# EAGLE board Vectr_Combined (EAGLE 6.3), part 1 of 2
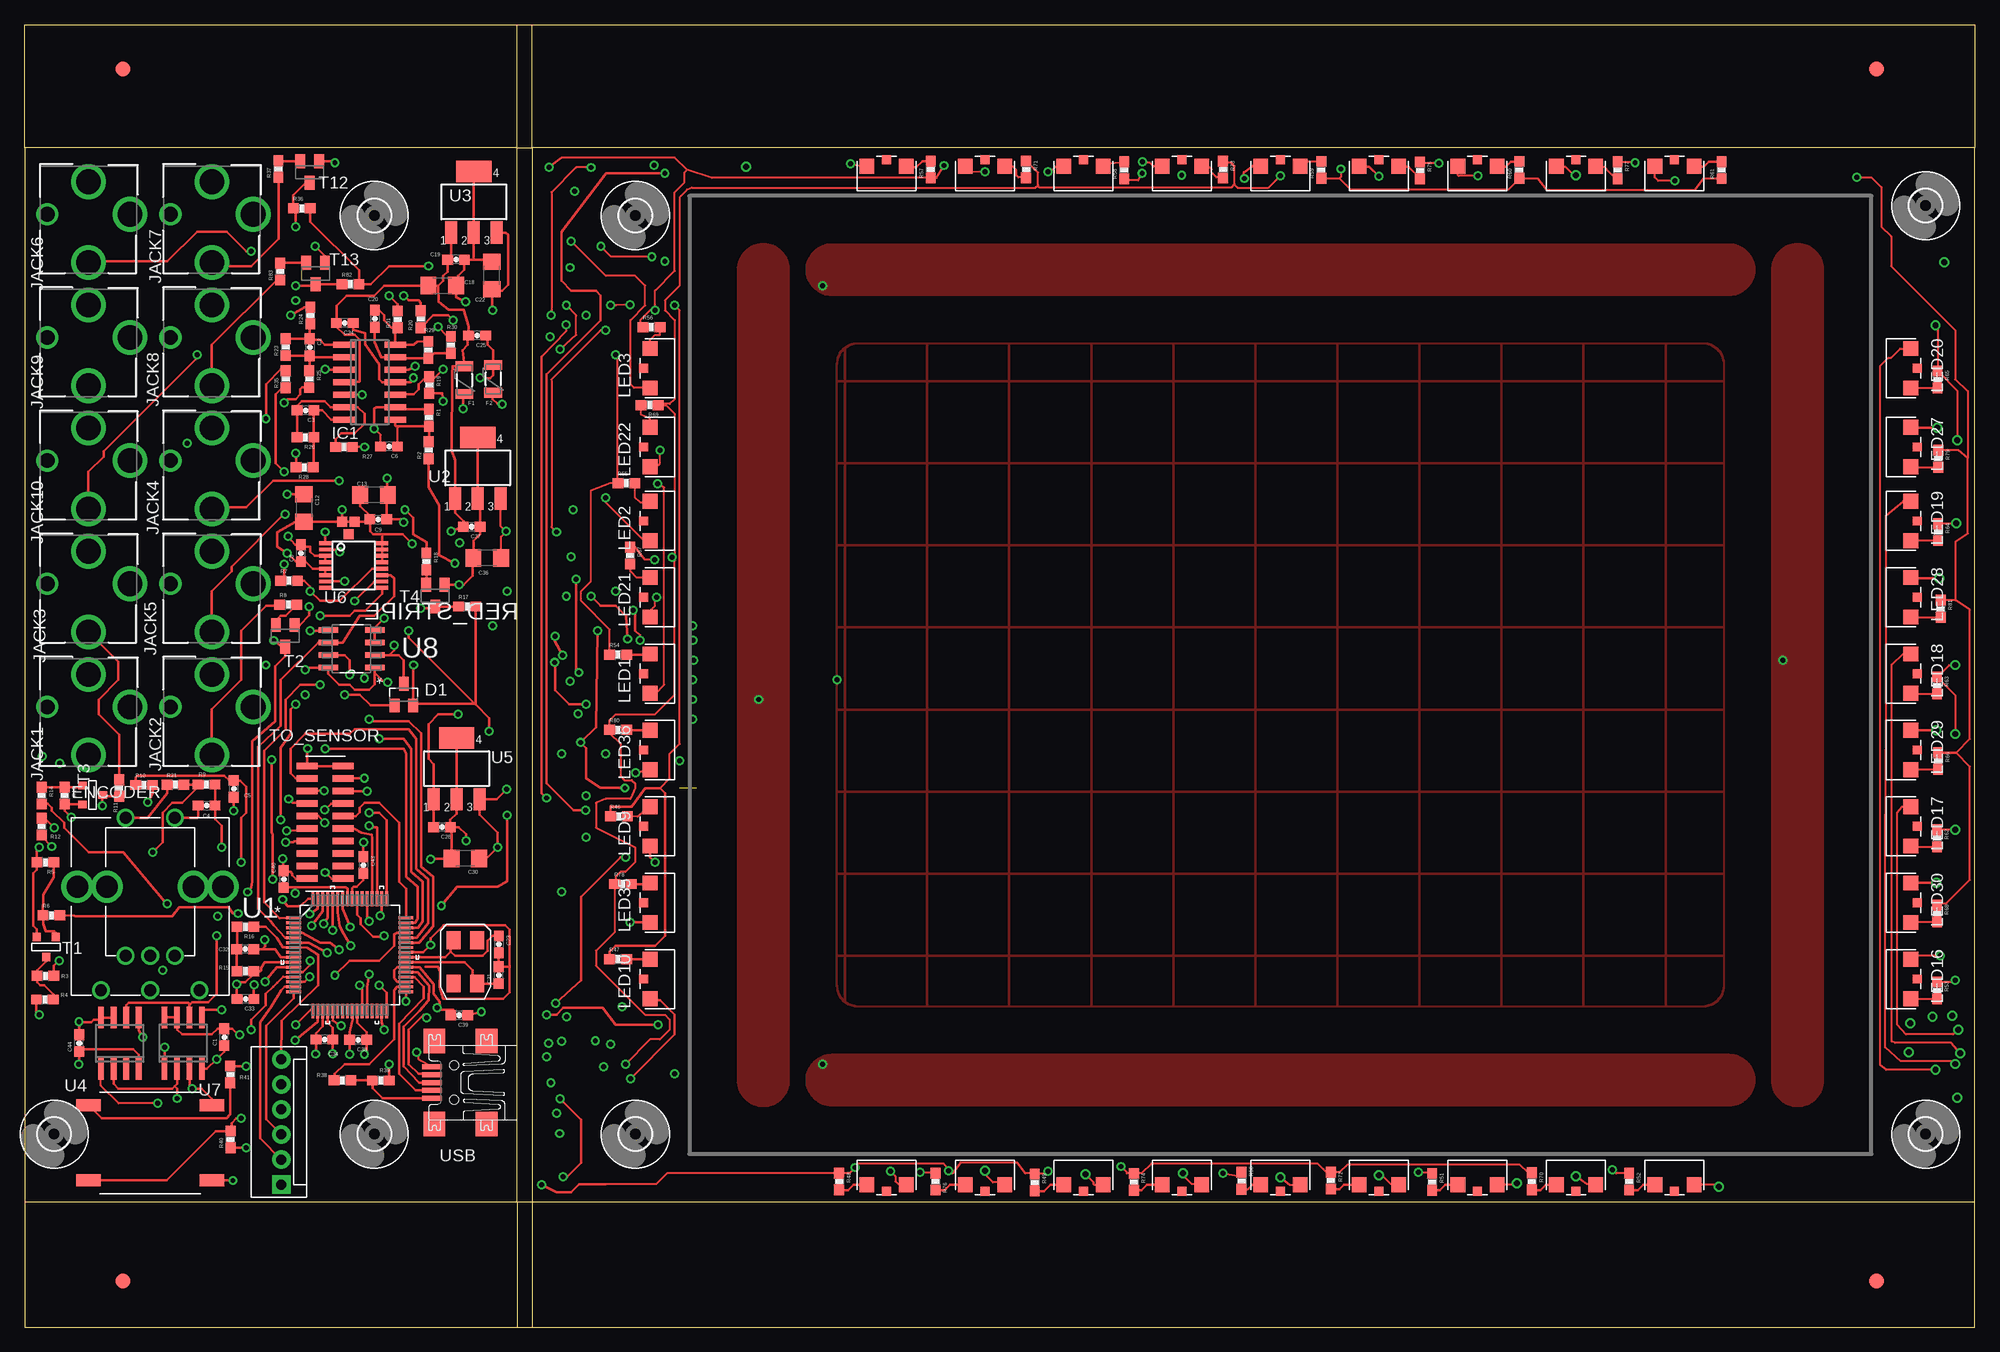
[diagram p0: board, top side]
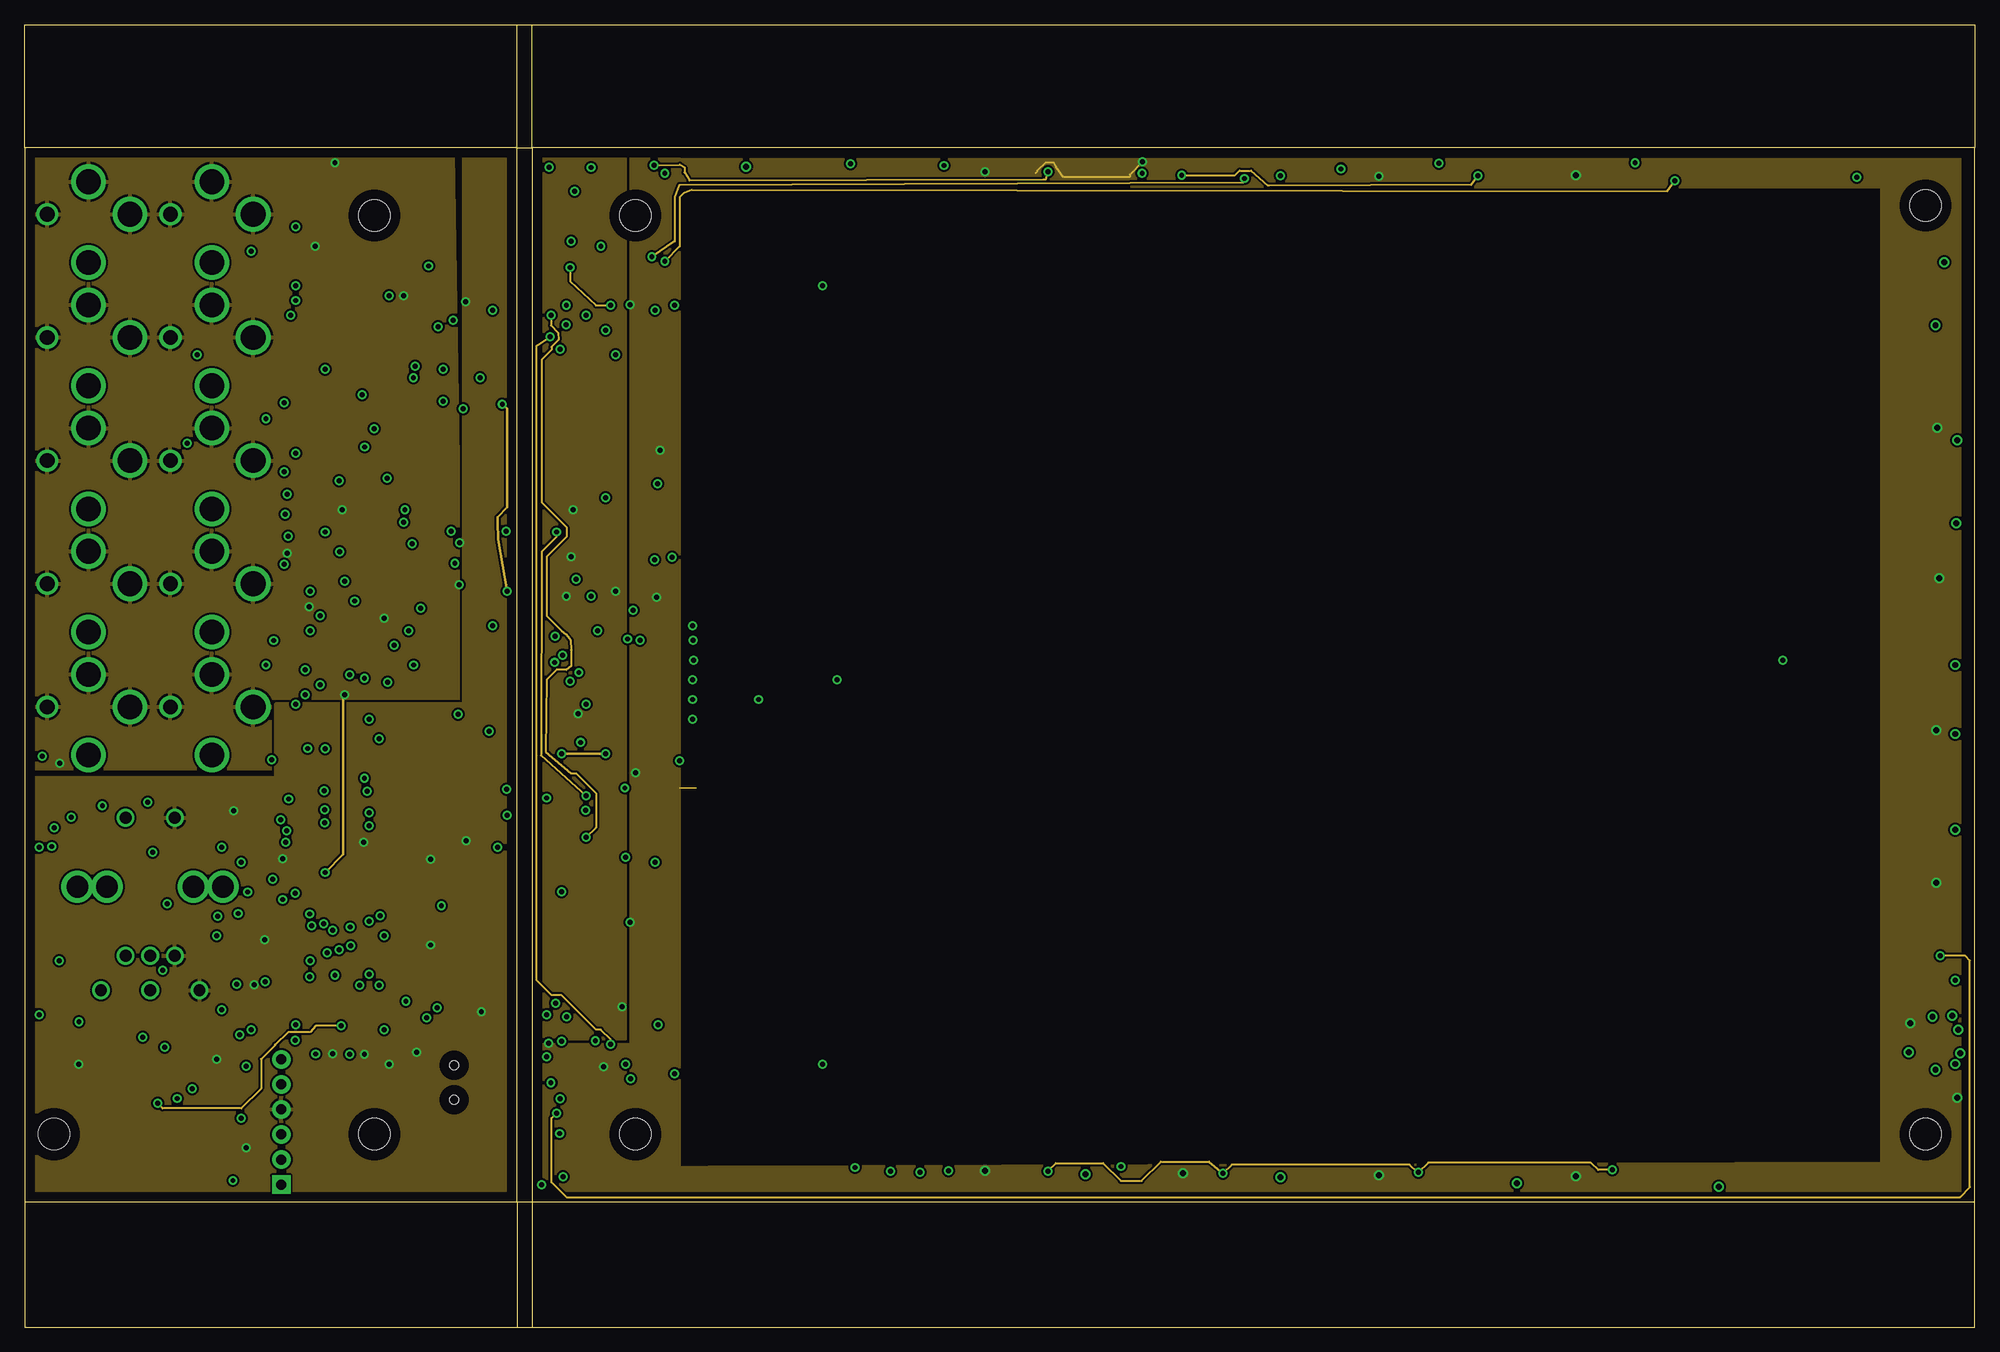
[diagram p1: board, inner layer Route2]
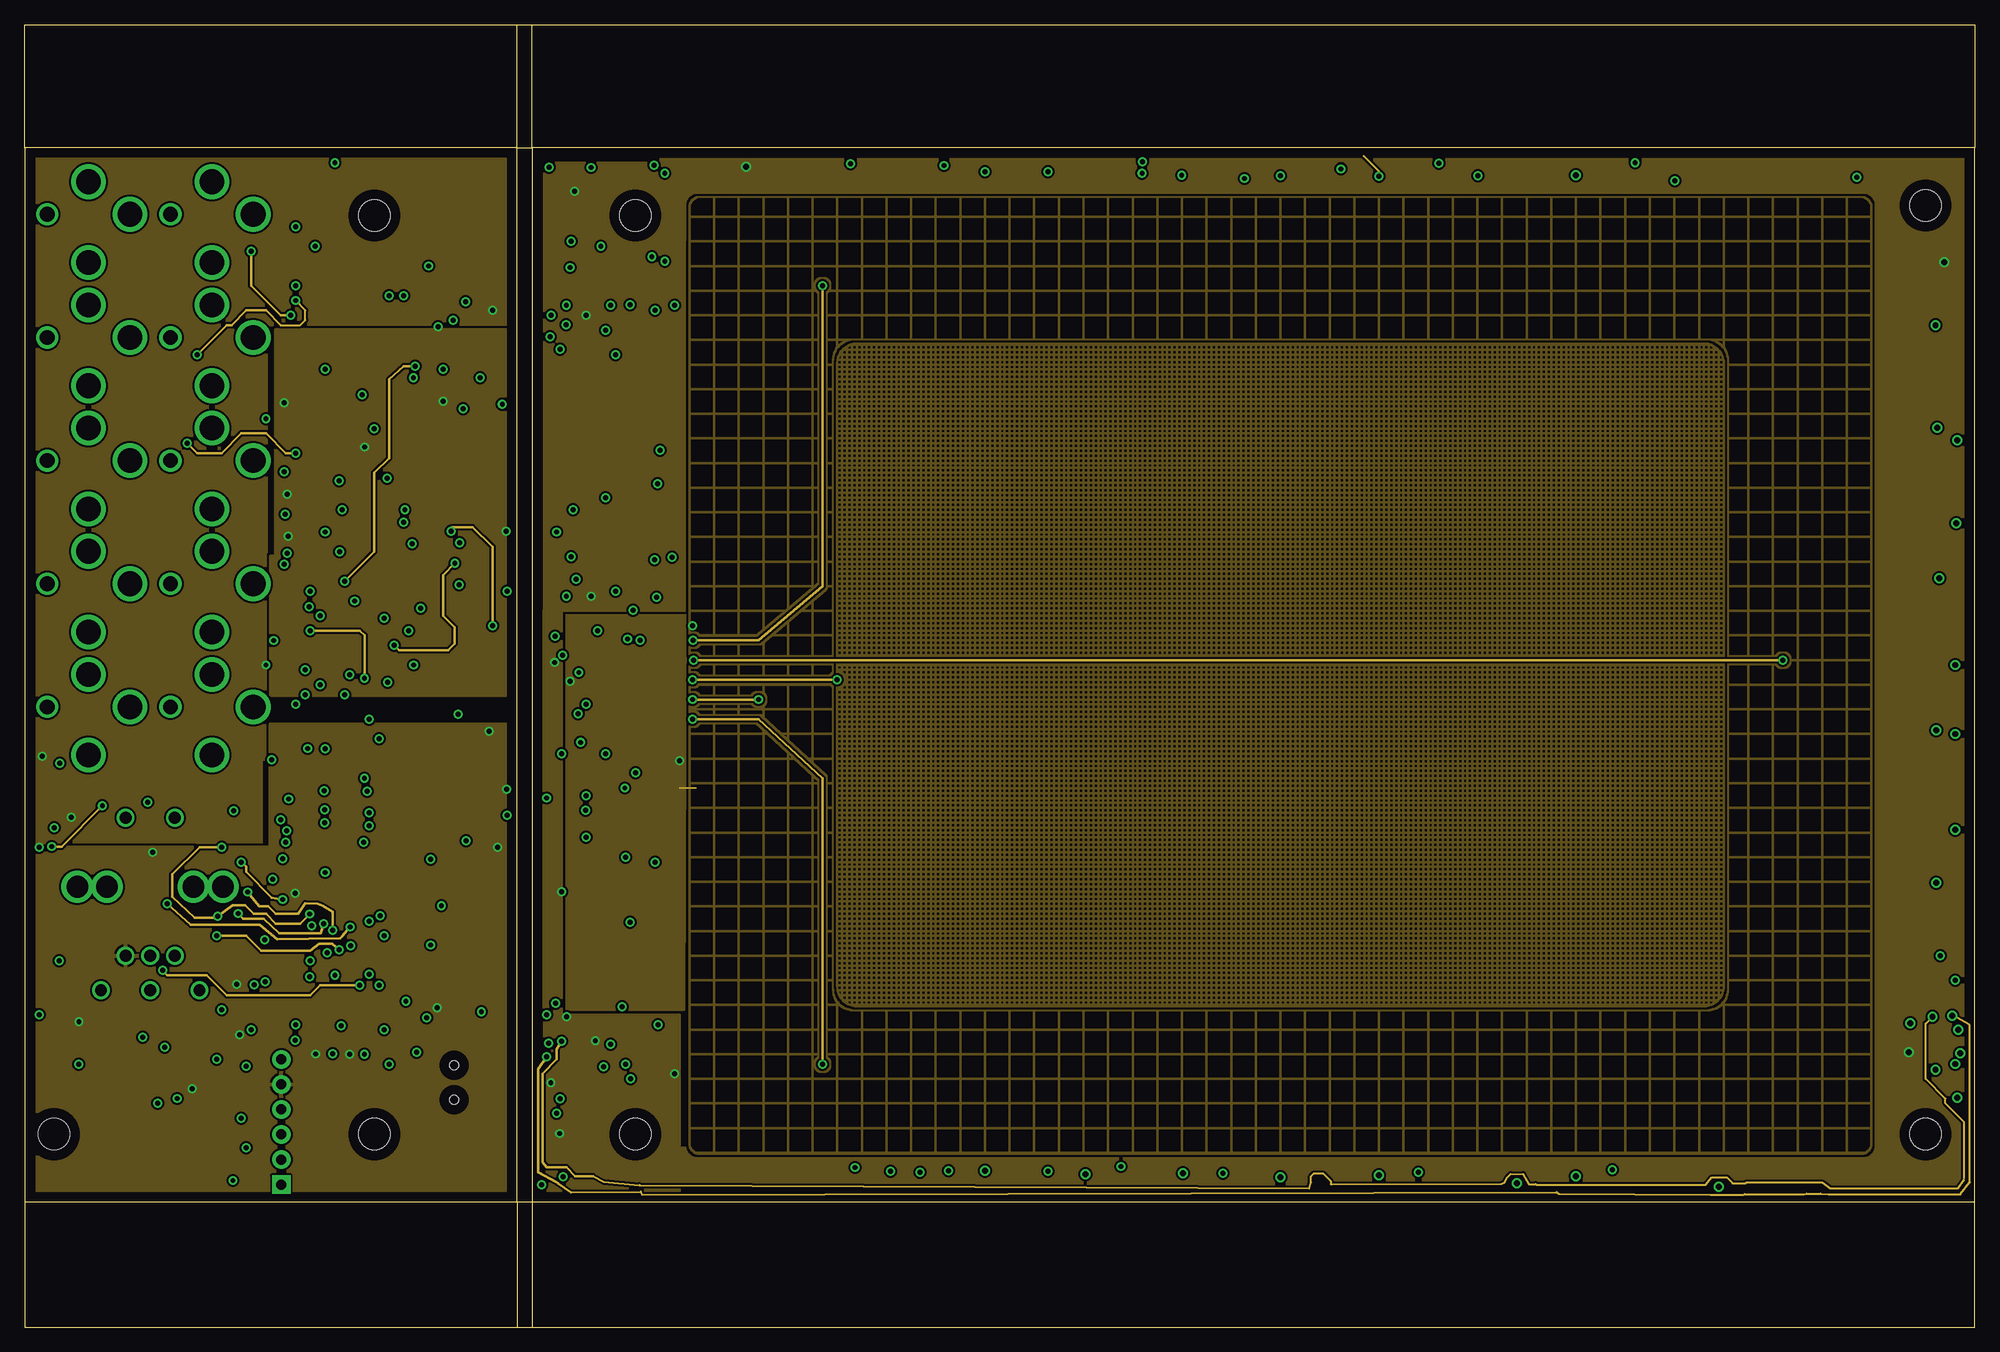
[diagram p2: board, inner layer Route15]
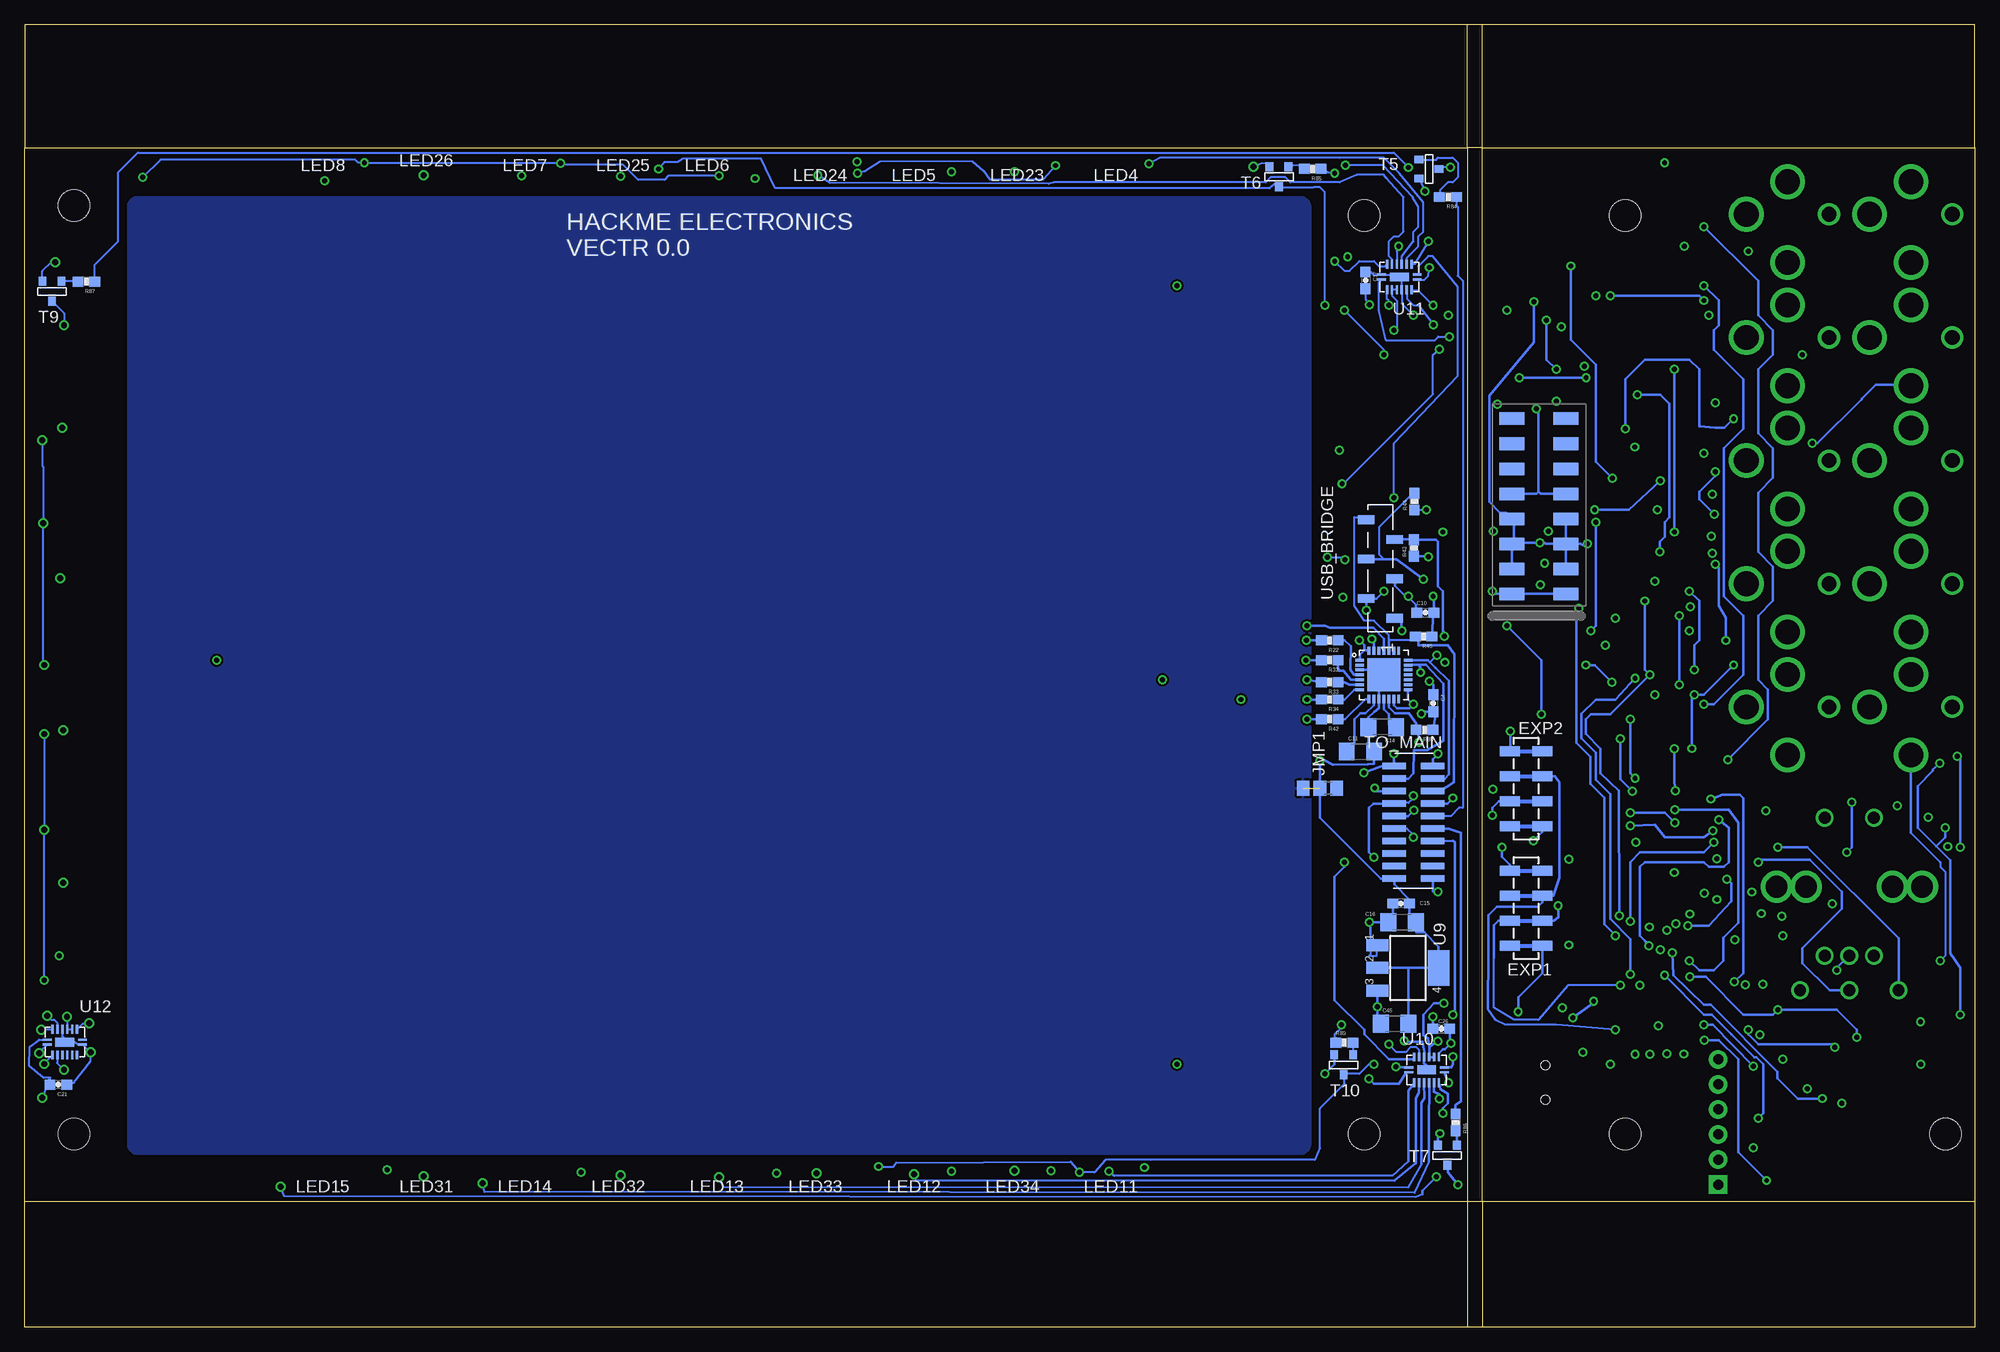
[diagram p3: board, bottom side, seen from below]

Size 198 x 132.2 mm. Coordinates in mm from the lower left corner, seen from the top.
Outline: 0,12.7 50,12.7
Outline: 50,12.7 50,119.7
Outline: 50,119.7 0,119.7
Outline: 0,119.7 0,12.7
Outline: 51.5,12.7 198,12.7
Outline: 198,12.7 198,119.7
Outline: 198,119.7 51.5,119.7
Outline: 51.5,119.7 51.5,12.7
Outline: 50,12.7 51.5,12.7
Outline: 50,119.7 51.5,119.7
Outline: 0,119.7 0,132.2 50,132.2
Outline: 50,132.2 51.5,132.2
Outline: 51.5,132.2 198,132.2 198,119.7
Outline: 0,12.7 0,0 50,0
Outline: 50,0 51.5,0
Outline: 51.5,0 198,0 198,12.7
Outline: 50,119.7 50,132.2
Outline: 51.5,119.7 51.5,132.2
Outline: 50,12.7 50,0
Outline: 51.5,12.7 51.5,0
Copper layers (1*2+15*16): Top 0.035mm / dielectric 1.5mm / Route2 0.035mm / dielectric 0.15mm / Route15 0.035mm / dielectric 0.2mm / Bottom 0.035mm
Design rules "default *": minimum track width 10mil, minimum drill 24mil, track to track 8mil, track to pad 8mil, pad to pad 8mil, via to via 8mil, smd to smd 8mil, copper to edge 40mil, drill to drill 8mil, minimum pad ring 10mil, minimum via ring 8mil, stop-mask expansion 4mil, vias tented up to drill 0mil, thermal gap 10mil

## Footprints (pad centres in the part's own frame; a part is rotated, then mirrored left to right if it is on the bottom)
0603-CAP = smd 1.1 x 1: 1 -0.85,0; 2 0.85,0
1206 = smd 1.6 x 1.8: 1 -1.4,0; 2 1.4,0
SMD-4-CRYSTAL = smd 1.803 x 1.397: 1 -2.197,-1.194; 2 2.197,-1.194; 3 2.197,1.194; 4 -2.197,1.194
SOT23 = smd 1 x 1.4: 1 -0.95,-1.1; 2 0.95,-1.1; 3 0,1.1
FIDUCIAL-1.5X3 = smd 1.5 x 1.5: 1 0,0
PEC16_ENCODER = drill 1.2: A -5,-10.5; B 0,-10.5; C 5,-10.5; D -2.5,7; E 2.5,7 | drill 2.2: P$6 -7.4,0; P$7 7.4,0
1X04_SMD_STRAIGHT_COMBO = smd 1 x 2: 1 0,-1.65; 1-2 0,1.65; 2 2.54,1.65; 2-2 2.54,-1.65; 3 5.08,-1.65; 3-2 5.08,1.65; 4 7.62,1.65; 4-2 7.62,-1.65
PTC-1206 = smd 1 x 1.8: 1 -1.4,0; 2 1.4,0
SO14 = smd 0.6 x 2.2: 1 -3.81,-2.6; 2 -2.54,-2.6; 3 -1.27,-2.6; 4 0,-2.6; 5 1.27,-2.6; 6 2.54,-2.6; 7 3.81,-2.6; 8 3.81,2.6; 9 2.54,2.6; 10 1.27,2.6; 11 0,2.6; 12 -1.27,2.6; 13 -2.54,2.6; 14 -3.81,2.6
ERTHENVAR-JACK = drill 2.5: 1@1 -4.2,0; 2 0,-3.3; 3 0,4.9 | drill 1.5: 1@2 4.2,0
A0R-JMP = smd 1.5 x 1.3: 1 0,1.7; 2 0,0; 3 0,-1.7
APA3010 = smd 1.5 x 1.5: P$1 2,0; P$2 -2,0 | smd 0.9 x 0.9: P$3 0,0.65
9MMPOT = drill 1.2: 1 -2.5,-7; 2 0,-7; 3 2.5,-7 | drill 2.2: P$4 -4.4,0; P$5 4.4,0
16-SMT = smd 1.27 x 2.54: P$1 0,0; P$2 0,5.46; P$3 2.54,0; P$4 2.54,5.46; P$5 5.08,0; P$6 5.08,5.46; P$7 7.62,0; P$8 7.62,5.46; P$9 10.16,0; P$10 10.16,5.46; P$11 12.7,0; P$12 12.7,5.46; P$13 15.24,0; P$14 15.24,5.46; P$15 17.78,0; P$16 17.78,5.46
0603-RES = smd 1.1 x 1: 1 -0.85,0; 2 0.85,0
SOT-23 = smd 0.787 x 0.889: 1 0.025,-1.016; 2 -0.94,1.016; 3 0.991,1.016
SOT23-EBC = smd 1 x 1.4: B 0.95,-1.1; C 0,1.1; E -0.95,-1.1
M50-3601042 = smd 0.65 x 2.4 bottom: 1 0,-1.95; 2 1.27,-1.95; 3 2.54,-1.95; 4 3.81,-1.95; 5 5.08,-1.95; 6 6.35,-1.95; 7 7.62,-1.95; 8 8.89,-1.95; 9 10.16,-1.95; 10 11.43,-1.95; 11 11.43,1.95; 12 10.16,1.95; 13 8.89,1.95; 14 7.62,1.95; 15 6.35,1.95; 16 5.08,1.95; 17 3.81,1.95; 18 2.54,1.95; 19 1.27,1.95; 20 0,1.95
M50-3101045 = smd 0.65 x 2.15: 1 0,-1.825; 2 1.27,-1.825; 3 2.54,-1.825; 4 3.81,-1.825; 5 5.08,-1.825; 6 6.35,-1.825; 7 7.62,-1.825; 8 8.89,-1.825; 9 10.16,-1.825; 10 11.43,-1.825; 11 11.43,1.825; 12 10.16,1.825; 13 8.89,1.825; 14 7.62,1.825; 15 6.35,1.825; 16 5.08,1.825; 17 3.81,1.825; 18 2.54,1.825; 19 1.27,1.825; 20 0,1.825
QFP50P1200X1200X120-64N = smd 1.5 x 0.3: 1 -5.7,3.75; 2 -5.7,3.25; 3 -5.7,2.75; 5 -5.7,1.75; 6 -5.7,1.25; 7 -5.7,0.75; 8 -5.7,0.25; 9 -5.7,-0.25; 10 -5.7,-0.75; 11 -5.7,-1.25; 12 -5.7,-1.75; 13 -5.7,-2.25; 14 -5.7,-2.75; 15 -5.7,-3.25; 16 -5.7,-3.75; 33 5.7,-3.75; 34 5.7,-3.25; 35 5.7,-2.75; 36 5.7,-2.25; 37 5.7,-1.75; 38 5.7,-1.25; 39 5.7,-0.75; 40 5.7,-0.25; 41 5.7,0.25; 42 5.7,0.75; 43 5.7,1.25; 44 5.7,1.75; 45 5.7,2.25; 46 5.7,2.75; 47 5.7,3.25; 48 5.7,3.75 | smd 1.473 x 0.279: 4 -5.7,2.25 | smd 0.3 x 1.5: 17 -3.75,-5.7; 18 -3.25,-5.7; 19 -2.75,-5.7; 20 -2.25,-5.7; 21 -1.75,-5.7; 22 -1.25,-5.7; 23 -0.75,-5.7; 24 -0.25,-5.7; 25 0.25,-5.7; 26 0.75,-5.7; 27 1.25,-5.7; 28 1.75,-5.7; 29 2.25,-5.7; 30 2.75,-5.7; 31 3.25,-5.7; 32 3.75,-5.7; 49 3.75,5.7; 50 3.25,5.7; 51 2.75,5.7; 52 2.25,5.7; 53 1.75,5.7; 54 1.25,5.7; 56 0.25,5.7; 57 -0.25,5.7; 58 -0.75,5.7; 59 -1.25,5.7; 60 -1.75,5.7; 61 -2.25,5.7; 62 -2.75,5.7; 63 -3.25,5.7; 64 -3.75,5.7 | smd 0.279 x 1.473: 55 0.75,5.7
SOT223 = smd 1.219 x 2.235: 1 -2.311,-3.099; 2 0,-3.099; 3 2.311,-3.099 | smd 3.6 x 2.2: 4 0,3.099
SO-08 = smd 0.6 x 2.2: 1 -1.905,-2.6; 2 -0.635,-2.6; 3 0.635,-2.6; 4 1.905,-2.6; 5 1.905,2.6; 6 0.635,2.6; 7 -0.635,2.6; 8 -1.905,2.6
PW_R-PDSO-G16 = smd 0.4 x 1.2: 1 -2.275,-2.9; 2 -1.625,-2.9; 3 -0.975,-2.9; 4 -0.325,-2.9; 5 0.325,-2.9; 6 0.975,-2.9; 7 1.625,-2.9; 8 2.275,-2.9; 9 2.275,2.9; 10 1.625,2.9; 11 0.975,2.9; 12 0.325,2.9; 13 -0.325,2.9; 14 -0.975,2.9; 15 -1.625,2.9; 16 -2.275,2.9
SOIC127P600X175-8N = smd 1.981 x 0.559: 1 -2.362,1.905; 2 -2.362,0.635; 3 -2.362,-0.635; 4 -2.362,-1.905; 5 2.362,-1.905; 6 2.362,-0.635; 7 2.362,0.635; 8 2.362,1.905
DHVQFN16 = smd 0.9 x 0.24: 1 -1.8,-0.25; 8 1.8,-0.25; 9 1.8,0.25; 16 -1.8,0.25 | smd 0.24 x 0.9: 2 -1.25,-1.3; 3 -0.75,-1.3; 4 -0.25,-1.3; 5 0.25,-1.3; 6 0.75,-1.3; 7 1.25,-1.3; 10 1.25,1.3; 11 0.75,1.3; 12 0.25,1.3; 13 -0.25,1.3; 14 -0.75,1.3; 15 -1.25,1.3 | smd 1.9 x 0.9: PAD 0,0
QFN28 = smd 0.85 x 0.3: P$1 -2.45,1.5; P$2 -2.45,1; P$3 -2.45,0.5; P$4 -2.45,0; P$5 -2.45,-0.5; P$6 -2.45,-1; P$7 -2.45,-1.5; P$15 2.45,-1.5; P$16 2.45,-1; P$17 2.45,-0.5; P$18 2.45,0; P$19 2.45,0.5; P$20 2.45,1; P$21 2.45,1.5 | smd 0.3 x 0.85: P$8 -1.5,-2.45; P$9 -1,-2.45; P$10 -0.5,-2.45; P$11 0,-2.45; P$12 0.5,-2.45; P$13 1,-2.45; P$14 1.5,-2.45; P$22 1.5,2.45; P$23 1,2.45; P$24 0.5,2.45; P$25 0,2.45; P$26 -0.5,2.45; P$27 -1,2.45; P$28 -1.5,2.45 | smd 3.35 x 3.35: P$29 0,0
3,2 = hole 3.2: 0,0
5GSH9 = smd 2.5 x 1.2: 1 6.25,3.81; 2 -6.25,3.81; 3 6.25,-3.81; 4 -6.25,-3.81
MOLEX-1X6 = drill 1.016 pad 1.88 square: 1 0,0 | drill 1.016 pad 1.88: 2 2.54,0; 3 5.08,0; 4 7.62,0; 5 10.16,0; 6 12.7,0
GND_CONNECT = smd 1.016 x 1.016: 1 -1.016,0; 2 -1.016,-1.27; 3 0.254,-0.635
UX60-MB-5ST = smd 2 x 0.5: 1 2.25,1.6; 2 2.25,0.8; 3 2.25,0; 4 2.25,-0.8; 5 2.25,-1.6 | smd 2.2 x 2.5: M1 -3.3,-4.2; M2 -3.3,4.2; M3 2,4.2; M4 2,-4.2 | hole 0.9: 0,-1.75; 0,1.75
1X06_SMD_STRAIGHT = smd 0.89 x 1.67: 1 0,1.465; 2 -2,-1.465; 3 -4,1.465; 4 -6,-1.465; 5 -8,1.465; 6 -10,-1.465

## Placement (x,y rotation side)
C1  .1uF  [0603-CAP]  20.27,29.43 90 top
C2  100pF  [0603-CAP]  28.95,99.45 270 top
C3  100pF  [0603-CAP]  28.52,93.05 180 top
C4  .01uF  [0603-CAP]  18.47,52.94 0 top
C5  .01uF  [0603-CAP]  21.24,54.63 90 top
C6  1nF  [0603-CAP]  37,89.38 180 top
C7  .1uF  [0603-CAP]  54.98,63.32 270 bottom
C8  .1uF  [0603-CAP]  28.05,78.56 90 top
C9  .1uF  [0603-CAP]  35.91,81.98 0 top
C10  .1uF  [0603-CAP]  55.79,72.52 0 bottom
C11  4.7uF  [1206]  62.38,58.41 0 bottom
C12  4.7uF  [1206]  28.35,83.14 270 top
C13  4.7uF  [1206]  35.47,84.45 180 top
C14  4.7uF  [1206]  60.16,60.89 180 bottom
C15  .1uF  [0603-CAP]  58.25,43 180 bottom
C16  4.7uF  [1206]  58.15,41.1 0 bottom
C17  .1uF  [0603-CAP]  61.86,106.24 270 bottom
C18  4.7uF  [1206]  42.4,105.71 0 top
C19  .1uF  [0603-CAP]  43.79,108.35 180 top
C20  100pF  [0603-CAP]  35.56,102.35 270 top
C21  .1uF  [0603-CAP]  194.57,24.61 180 bottom
C22  4.7uF  [1206]  47.44,106.74 90 top
C23  18pF  [0603-CAP]  48.15,38.85 270 top
C24  .1uF  [0603-CAP]  32.5,101.91 180 top
C25  .1uF  [0603-CAP]  45.94,100.64 180 top
C26  .1uF  [0603-CAP]  54.17,30.28 0 bottom
C28  .1uF  [0603-CAP]  42.37,50.74 180 top
C30  4.7uF  [1206]  44.74,47.55 180 top
C31  18pF  [0603-CAP]  48.14,35.72 90 top
C32  .1uF  [0603-CAP]  22.39,38.36 180 top
C33  .1uF  [0603-CAP]  22.43,33.3 180 top
C34  .1uF  [0603-CAP]  30.44,29.19 180 top
C36  4.7uF  [1206]  46.97,78.05 180 top
C37  .1uF  [0603-CAP]  45.4,81.23 180 top
C38  .1uF  [0603-CAP]  33.86,29.16 180 top
C39  .1uF  [0603-CAP]  44.12,31.65 180 top
C40  .1uF  [0603-CAP]  26.31,45.47 270 top
C43  .1uF  [0603-CAP]  34.39,46.9 270 top
C44  .1uF  [0603-CAP]  5.54,28.82 90 top
C45  4.7uF  [1206]  58.9,30.8 0 bottom
CRYSTAL  SMD-4-CRYSTAL  [SMD-4-CRYSTAL]  44.76,37.07 90 top
D1  BAT54S  [SOT23]  38.5,64.2 0 top
E$1  [FIDUCIAL-1.5X3]  10,127.7 0 top
E$2  [FIDUCIAL-1.5X3]  188,127.7 0 top
E$3  [FIDUCIAL-1.5X3]  188,4.7 0 top
E$4  [FIDUCIAL-1.5X3]  10,4.7 0 top
ENCODER  PEC16_ENCODER  [PEC16_ENCODER]  12.75,44.7 0 top
EXP1  [1X04_SMD_STRAIGHT_COMBO]  45.57,38.71 90 bottom
EXP2  [1X04_SMD_STRAIGHT_COMBO]  45.57,50.84 90 bottom
F1  PTCSMD  [PTC-1206]  44.66,96.11 90 top
F2  PTCSMD  [PTC-1206]  47.57,96.25 90 top
IC1  TL074D  [SO14]  35.04,95.91 270 top
JACK1  AUDIO-JACKERTHENVAR  [ERTHENVAR-JACK]  6.5,62.95 180 top
JACK2  AUDIO-JACKERTHENVAR  [ERTHENVAR-JACK]  19,62.95 180 top
JACK3  AUDIO-JACKERTHENVAR  [ERTHENVAR-JACK]  6.5,75.45 180 top
JACK4  AUDIO-JACKERTHENVAR  [ERTHENVAR-JACK]  19,87.95 180 top
JACK5  AUDIO-JACKERTHENVAR  [ERTHENVAR-JACK]  19,75.45 180 top
JACK6  AUDIO-JACKERTHENVAR  [ERTHENVAR-JACK]  6.5,112.95 180 top
JACK7  AUDIO-JACKERTHENVAR  [ERTHENVAR-JACK]  19,112.95 180 top
JACK8  AUDIO-JACKERTHENVAR  [ERTHENVAR-JACK]  19,100.45 180 top
JACK9  AUDIO-JACKERTHENVAR  [ERTHENVAR-JACK]  6.5,100.45 180 top
JACK10  AUDIO-JACKERTHENVAR  [ERTHENVAR-JACK]  6.5,87.95 180 top
JMP1  0R-JUMPA  [A0R-JMP]  66.5,54.7 270 bottom
LED1  APA3010QBC/D-GX  [APA3010]  63.5,66.33 90 top
LED2  APA3010QBC/D-GX  [APA3010]  63.5,81.83 90 top
LED3  APA3010QBC/D-GX  [APA3010]  63.5,97.33 90 top
LED4  APA3010QBC/D-GX  [APA3010]  87.5,117.83 0 top
LED5  APA3010QBC/D-GX  [APA3010]  107.5,117.83 0 top
LED6  APA3010QBC/D-GX  [APA3010]  127.5,117.83 0 top
LED7  APA3010QBC/D-GX  [APA3010]  147.5,117.83 0 top
LED8  APA3010QBC/D-GX  [APA3010]  167.5,117.83 0 top
LED9  APA3010QBC/D-GX  [APA3010]  63.5,50.83 90 top
LED10  APA3010QBC/D-GX  [APA3010]  63.5,35.33 90 top
LED11  APA3010QBC/D-GX  [APA3010]  87.5,14.45 180 top
LED12  APA3010QBC/D-GX  [APA3010]  107.5,14.45 180 top
LED13  APA3010QBC/D-GX  [APA3010]  127.5,14.45 180 top
LED14  APA3010QBC/D-GX  [APA3010]  147.5,14.45 180 top
LED15  APA3010QBC/D-GX  [APA3010]  167.5,14.45 180 top
LED16  APA3010QBC/D-GX  [APA3010]  191.5,35.33 270 top
LED17  APA3010QBC/D-GX  [APA3010]  191.5,50.83 270 top
LED18  APA3010QBC/D-GX  [APA3010]  191.5,66.33 270 top
LED19  APA3010QBC/D-GX  [APA3010]  191.5,81.83 270 top
LED20  APA3010QBC/D-GX  [APA3010]  191.5,97.33 270 top
LED21  APA3010SRCPRV-GX  [APA3010]  63.5,74.08 90 top
LED22  APA3010SRCPRV-GX  [APA3010]  63.5,89.33 90 top
LED23  APA3010SRCPRV-GX  [APA3010]  97.5,117.83 0 top
LED24  APA3010SRCPRV-GX  [APA3010]  117.5,117.83 0 top
LED25  APA3010SRCPRV-GX  [APA3010]  137.5,117.83 0 top
LED26  APA3010SRCPRV-GX  [APA3010]  157.5,117.83 0 top
LED27  APA3010SRCPRV-GX  [APA3010]  191.5,89.33 270 top
LED28  APA3010SRCPRV-GX  [APA3010]  191.5,74.08 270 top
LED29  APA3010SRCPRV-GX  [APA3010]  191.5,58.58 270 top
LED30  APA3010SRCPRV-GX  [APA3010]  191.5,43.08 270 top
LED31  APA3010SRCPRV-GX  [APA3010]  157.5,14.45 180 top
LED32  APA3010SRCPRV-GX  [APA3010]  137.5,14.45 180 top
LED33  APA3010SRCPRV-GX  [APA3010]  117.5,14.45 180 top
LED34  APA3010SRCPRV-GX  [APA3010]  97.5,14.45 180 top
LED35  APA3010SRCPRV-GX  [APA3010]  63.5,43.08 90 top
LED36  APA3010SRCPRV-GX  [APA3010]  63.5,58.58 90 top
POT  9MMPOT  [9MMPOT]  12.75,44.7 0 top
POWER  16-SMT  [16-SMT]  47,92.2 270 bottom
R1  24.9k  [0603-RES]  41.05,92.3 270 top
R2  1k  [0603-RES]  41.03,89 90 top
R3  1k  [0603-RES]  2.11,35.66 0 top
R4  10k  [0603-RES]  2.05,33.25 0 top
R5  10k  [0603-RES]  2.1,47.17 180 top
R6  100k  [0603-RES]  2.71,41.8 0 top
R7  10k  [0603-RES]  26.85,75.76 0 top
R8  100k  [0603-RES]  26.76,73.33 0 top
R9  10k  [0603-RES]  18.48,55.07 180 top
R10  10k  [0603-RES]  12.13,55.02 0 top
R11  1k  [0603-RES]  9.59,54.72 90 top
R12  10k  [0603-RES]  1.73,50.8 270 top
R13  10k  [0603-RES]  4.06,53.94 270 top
R14  100k  [0603-RES]  1.73,53.95 270 top
R15  10k  [0603-RES]  22.4,36.12 0 top
R16  1k  [0603-RES]  22.41,40.62 180 top
R17  10k  [0603-RES]  44.93,73.14 0 top
R18  100k  [0603-RES]  40.79,77.72 270 top
R19  100k  [0603-RES]  41.07,95.62 270 top
R20  100k  [0603-RES]  40.21,102.3 270 top
R21  10k  [0603-RES]  15.31,55.05 0 top
R22  10k  [0603-RES]  65.5,69.7 180 bottom
R23  10k  [0603-RES]  26.51,99.47 90 top
R24  1k  [0603-RES]  29.01,102.68 90 top
R25  10k  [0603-RES]  28.9,96.22 270 top
R26  10k  [0603-RES]  28.52,90.31 180 top
R27  10k  [0603-RES]  32.42,89.33 180 top
R28  1k  [0603-RES]  28.43,87.27 180 top
R29  10k  [0603-RES]  40.99,99.19 90 top
R30  10k  [0603-RES]  43.27,99.69 90 top
R31  1k  [0603-RES]  37.88,102.29 90 top
R32  10k  [0603-RES]  65.5,67.7 180 bottom
R33  10k  [0603-RES]  65.5,65.46 180 bottom
R34  10k  [0603-RES]  65.5,63.7 180 bottom
R35  100k  [0603-RES]  26.52,96.21 90 top
R36  10k  [0603-RES]  28.14,113.56 0 top
R37  100k  [0603-RES]  25.77,117.55 90 top
R38  10k  [0603-RES]  32.28,25.04 180 top
R39  10k  [0603-RES]  36.16,25.03 180 top
R40  10k  [0603-RES]  20.92,19.06 90 top
R41  270  [0603-RES]  20.88,25.65 270 top
R42  10k  [0603-RES]  65.5,61.7 180 bottom
R43  1.8k  [0603-RES]  56.95,79.08 90 bottom
R44  1.8k  [0603-RES]  56.9,83.79 90 bottom
R45  10k  [0603-RES]  55.96,70.1 180 bottom
R46  47  [0603-RES]  60.34,51.85 0 top
R47  47  [0603-RES]  60.25,37.35 0 top
R48  47  [0603-RES]  82.7,14.78 270 top
R49  47  [0603-RES]  102.55,14.69 270 top
R50  47  [0603-RES]  123.55,14.85 270 top
R51  47  [0603-RES]  142.9,14.74 270 top
R52  47  [0603-RES]  162.9,14.77 270 top
R53  47  [0603-RES]  194.15,34.18 270 top
R54  47  [0603-RES]  60.25,68.26 0 top
R55  47  [0603-RES]  61.1,85.66 0 top
R56  47  [0603-RES]  63.65,101.5 0 top
R57  47  [0603-RES]  92,117.5 90 top
R58  47  [0603-RES]  111.64,117.42 90 top
R59  47  [0603-RES]  131.64,117.46 90 top
R60  47  [0603-RES]  151.74,117.45 90 top
R61  47  [0603-RES]  172.29,117.44 90 top
R62  47  [0603-RES]  194.16,49.62 270 top
R63  47  [0603-RES]  194.16,65.13 270 top
R64  47  [0603-RES]  194.26,80.69 270 top
R65  47  [0603-RES]  194.21,96.2 270 top
R66  270  [0603-RES]  194.26,57.46 270 top
R67  270  [0603-RES]  61.46,78.3 270 top
R68  270  [0603-RES]  194.16,41.98 270 top
R69  270  [0603-RES]  63.45,93.58 180 top
R70  270  [0603-RES]  153.02,14.8 270 top
R71  270  [0603-RES]  101.67,117.51 270 top
R72  270  [0603-RES]  132.62,14.87 270 top
R73  270  [0603-RES]  121.67,117.48 270 top
R74  270  [0603-RES]  112.62,14.74 270 top
R75  270  [0603-RES]  141.67,117.4 270 top
R76  270  [0603-RES]  92.47,14.76 270 top
R77  270  [0603-RES]  161.72,117.42 270 top
R78  270  [0603-RES]  60.75,44.97 0 top
R79  270  [0603-RES]  194.27,88.14 270 top
R80  270  [0603-RES]  60.25,60.62 0 top
R81  270  [0603-RES]  194.52,72.91 270 top
R82  10k  [0603-RES]  33.09,105.85 0 top
R83  100k  [0603-RES]  25.95,107.13 90 top
R84  1k  [0603-RES]  53.5,114.71 180 bottom
R85  1k  [0603-RES]  67.23,117.56 180 bottom
R86  1k  [0603-RES]  52.71,20.78 270 bottom
R87  1k  [0603-RES]  191.74,106.12 180 bottom
R88  10k  [0603-RES]  55.88,60.63 180 bottom
R89  1k  [0603-RES]  64.01,28.87 0 bottom
T1  [SOT-23]  2.16,38.58 0 top
T2  [SOT23-EBC]  26.47,70.16 180 top
T3  [SOT-23]  6.9,53.99 90 top
T4  [SOT23-EBC]  41.7,74.24 180 top
T5  [SOT-23]  55.43,117.52 90 bottom
T6  [SOT-23]  70.67,116.76 0 bottom
T7  [SOT-23]  53.59,17.44 0 bottom
T9  [SOT-23]  195.24,105.13 0 bottom
T10  [SOT-23]  64.1,26.62 0 bottom
T12  [SOT23-EBC]  28.94,117.24 180 top
T13  [SOT23-EBC]  29.54,106.94 180 top
TO_MAIN  M50-3601042  [M50-3601042]  57,56.95 270 top
TO_SENSOR  M50-3101045  [M50-3101045]  30.5,56.95 270 top
U1  PIC32MX430-QFP  [QFP50P1200X1200X120-64N]  33.02,37.78 0 top
U2  MCP1755S  [SOT223]  46,87.2 0 top
U3  MCP1755S  [SOT223]  45.61,114.2 0 top
U4  23LC512  [SO-08]  9.66,28.81 0 top
U5  MCP1755S  [SOT223]  43.86,56.68 0 top
U6  DAC8554  [PW_R-PDSO-G16]  33.41,77.3 270 top
U7  SST25VF010A  [SO-08]  16.1,28.83 0 top
U8  MCP3201-CI/SN  [SOIC127P600X175-8N]  33.2,68.85 180 top
U9  MCP1755S  [SOT223]  57.55,36.45 270 bottom
U10  74HCT595BQ,115  [DHVQFN16]  55.66,26.11 0 bottom
U11  74HCT595BQ,115  [DHVQFN16]  58.43,106.58 180 bottom
U12  74HCT595BQ,115  [DHVQFN16]  193.92,28.92 0 bottom
U14  MGC3130  [QFN28]  60,66.2 0 bottom
U$1  [3,2]  3,19.57 0 top
U$2  5GSH9  [5GSH9]  12.75,18.7 0 top
U$3  [3,2]  35.5,112.83 0 top
U$4  PIC-ICSPPTH  [MOLEX-1X6]  26.07,14.47 90 top
U$5  [3,2]  35.5,19.57 0 top
U$6  [3,2]  62,112.83 0 top
U$7  [3,2]  193,113.83 0 top
U$8  [3,2]  193,19.57 0 top
U$9  [3,2]  62,19.57 0 top
U$11  GND_CONNECT  [GND_CONNECT]  33.51,80.71 270 top
USB  MINI-USB-UX60-MB-5ST  [UX60-MB-5ST]  43.6,24.82 180 top
USB_BRIDGE  6PIN2MMHEADER  [1X06_SMD_STRAIGHT]  60.35,71.95 270 bottom

## Library data of the parts
C1-C10 C15 C17 C19-C21 C23-C26 C28 C31-C34 C37-C40 C43 C44 R1-R89 U$11 = SparkFun-Passives
C11-C14 C16 C18 C22 C30 C36 C45 = SparkFun-Capacitors
CRYSTAL ENCODER LED1-LED36 POT POWER TO_MAIN TO_SENSOR U1-U7 U9-U12 U14 U$2 USB_BRIDGE = HackMe
D1 = diode
E$1-E$4 = SparkFun-Aesthetics
EXP1 EXP2 U$4 = SparkFun-Connectors
F1 F2 = SparkFun-PowerIC
IC1 = linear
JACK1-JACK10 = erthenvar
JMP1 = jump-0r-smd
T1 T3 = zetex; MPN: DSS20200L-7; OC_FARNELL: unknown; OC_NEWARK: 25R4554
T2 T4 T12 T13 = transistor
T5-T7 T9 T10 = zetex; OC_FARNELL: unknown; OC_NEWARK: unknown
U8 = Microchip_By_element14_Batch_1; MPN: MCP3201-CI/SN; OC_FARNELL: 3167240; OC_NEWARK: 73K1001; PACKAGE: SOIC-8; SUPPLIER: Microchip
U$1 U$3 U$5-U$9 = holes
USB = con-hirose; OC_FARNELL: unknown; OC_NEWARK: unknown

## Nets
3.3V: C1.2 C9.2 C13.1 C30.1 C33.2 C34.2 C38.2 C39.2 C40.2 C44.2 D1.2 EXP1.4 EXP2.4 POT.1 R7.2 R9.2 R10.2 R15.2 R17.2 R21.2 R36.2 R82.2 U1.10 U1.19 U1.25 U1.35 U1.38 U1.57 U4.7 U4.8 U5.3 U6.12 U7.3 U7.7 U7.8 U8.1 U8.8 U$2.1 U$4.5
3.3V1: C7.2 C10.2 C45.1 R43.1 R44.1 R45.1 R88.1 U9.3 U14.P$1 U14.P$28 USB_BRIDGE.2
5V: C22.1 R5.2 R13.2 T1.2 T3.2 TO_SENSOR.1 TO_SENSOR.20 U3.3
5V1: C15.2 C16.1 C17.2 C21.2 C26.2 LED21.P$2 LED22.P$2 LED23.P$2 LED24.P$2 LED25.P$2 LED26.P$2 LED27.P$2 LED28.P$2 LED29.P$2 LED30.P$2 LED31.P$2 LED32.P$2 LED33.P$2 LED34.P$2 LED35.P$2 LED36.P$2 TO_MAIN.1 TO_MAIN.20 U9.1 U10.10 U10.16 U11.10 U11.16 U12.10 U12.16
ADC_SPI_EN: U1.28 U8.5
AGND: C8.1 C12.2 C36.2 C37.1 D1.1 JACK1.1@1 JACK1.1@2 JACK1.2 JACK2.1@1 JACK2.1@2 JACK2.2 JACK3.1@1 JACK3.1@2 JACK3.2 JACK4.1@1 JACK4.1@2 JACK4.2 JACK5.1@1 JACK5.1@2 JACK5.2 JACK6.1@1 JACK6.1@2 JACK6.2 JACK7.1@1 JACK7.1@2 JACK7.2 JACK8.1@1 JACK8.1@2 JACK8.2 JACK9.1@1 JACK9.1@2 JACK9.2 JACK10.1@1 JACK10.1@2 JACK10.2 R4.1 R12.1 R20.1 T2.E T4.E T12.E T13.E TO_SENSOR.11 U2.2 U2.4 U6.5 U6.6 U8.3 U8.4 U$11.2
AGND1: C7.1 C11.2 C14.2 C15.1 C16.2 C45.2 JMP1.2 JMP1.3 TO_MAIN.11 U9.2 U9.4 U14.P$3 U14.P$10 U14.P$29
ANALOG_REFERENCE: C8.2 C12.1 C36.1 R19.2 R25.2 R27.1 R30.2 U2.3 U6.3 U6.4
BOTTOM_RX: R42.2
CENTER_RX: R33.2
D_MINUS: U1.36 USB.2
D_PLUS: U1.37 USB.3
DAC_SPI1_EN: U1.1 U6.9
DIRECTION: R7.1 T2.C U1.60
FLASH_SS: U1.13 U7.1
GATE_OUT: R14.2 U1.58
GND: C1.1 C4.1 C5.1 C9.1 C13.2 C18.2 C19.1 C22.2 C23.2 C28.1 C30.2 C31.2 C32.1 C33.1 C34.1 C38.1 C39.1 C40.1 C43.1 C44.1 ENCODER.C ENCODER.E EXP1.1 EXP2.1 POT.3 POWER.P$9 POWER.P$10 POWER.P$11 POWER.P$12 POWER.P$13 POWER.P$14 R39.1 R40.1 TO_SENSOR.10 U1.9 U1.20 U1.26 U1.41 U3.2 U3.4 U4.4 U5.2 U5.4 U6.13 U6.14 U6.15 U6.16 U7.4 U$4.4 U$11.1 USB.5
GND1: C10.1 C17.1 C21.1 C26.1 T5.2 T6.2 T7.2 T9.2 T10.2 TO_MAIN.10 U10.8 U10.13 U10.PAD U11.8 U11.13 U11.PAD U12.8 U12.13 U12.PAD U14.P$13 U14.P$15 U14.P$27 USB_BRIDGE.3
HOLD: R17.1 T4.C U1.55
I2C1_SCL: TO_SENSOR.2 U1.44
I2C1_SCL1: R43.2 TO_MAIN.2 U14.P$21 USB_BRIDGE.5
I2C1_SDA: TO_SENSOR.19 U1.43
I2C1_SDA1: R44.2 TO_MAIN.19 U14.P$20 USB_BRIDGE.4
I2C2_SCL: EXP1.2 EXP2.2 U1.32
I2C2_SDA: EXP1.3 EXP2.3 U1.31
LED_PWM_1: TO_SENSOR.5 U1.49
LED_PWM_2: TO_SENSOR.16 U1.48
LED_PWM_3: TO_SENSOR.6 U1.51
LED_PWM_4: TO_SENSOR.15 U1.52
LED_PWM_5: TO_SENSOR.7 U1.53
LED_PWM_6: R84.1 TO_MAIN.5
LED_PWM_7: R85.1 TO_MAIN.16
LED_PWM_8: R86.1 TO_MAIN.6
LED_PWM_9: R89.1 TO_MAIN.7
LED_PWM_10: R87.1 TO_MAIN.15
LEFT_RX: R34.2
LOOP_SYNC: R6.2 U1.61
MCLR: R16.1 U1.7 U$4.6
MGC3130_IRQ: TO_SENSOR.18 U1.46
MGC3130_IRQ1: R88.2 TO_MAIN.18 U14.P$12 USB_BRIDGE.1
MGC3130_RESET: TO_SENSOR.3 U1.47
MGC3130_RESET1: R45.2 TO_MAIN.3 U14.P$24 USB_BRIDGE.6
N$1: R5.1 R6.1 T1.3
N$2: C2.2 IC1.2 R23.1 R25.1
N$3: R22.1 U14.P$4
N$4: C2.1 IC1.1 R23.2 R24.1
N$5: R3.1 R4.2 T1.1
N$6: JACK1.3 R3.2
N$7: IC1.5 U6.2
N$8: JACK2.3 R8.1
N$9: R8.2 T2.B
N$10: R32.1 U14.P$5
N$11: C3.2 IC1.6 R26.2 R27.2
N$12: R13.1 R14.1 T3.3
N$13: R11.1 R12.2 T3.1
N$14: JACK3.3 R11.2
N$15: C3.1 IC1.7 R26.1 R28.1
N$16: R18.2 T4.B
N$17: C32.2 R15.1 R16.2
N$18: JACK4.3 R18.1
N$19: C20.2 IC1.13 R29.1 R30.1
N$20: C5.2 ENCODER.B R10.1 U1.64
N$21: C20.1 IC1.14 R29.2 R31.1
N$22: C6.2 IC1.9 R1.1 R35.2
N$23: IC1.3 U6.1
N$24: D1.3 R2.1 U8.2
N$25: JACK6.3 R24.2
N$26: JACK5.3 R35.1
N$27: C6.1 IC1.8 R1.2 R2.2
N$28: IC1.10 R19.1 R20.2
N$29: C4.2 ENCODER.A R9.1 U1.63
N$30: JACK7.3 R37.1
N$31: JACK9.3 R28.2
N$32: R37.2 T12.B
N$33: POT.2 U1.27
N$34: IC1.12 U6.7
N$35: U1.18 U$2.3
N$36: R33.1 U14.P$6
N$37: ENCODER.D R21.1
N$38: JACK10.3 R31.2
N$39: JACK8.3 R83.1
N$40: R83.2 T13.B
N$41: C23.1 CRYSTAL.3 U1.40
N$42: F1.1 POWER.P$7 POWER.P$8
N$43: C31.1 CRYSTAL.1 U1.39
N$44: F2.1 POWER.P$15 POWER.P$16
N$45: R38.1 R39.2 USB.1
N$46: C43.2 U1.56
N$47: R38.2 U1.34
N$48: R34.1 U14.P$7
N$49: R42.1 U14.P$8
N$50: U1.33 USB.4
N$51: R41.2 U$2.2
N$52: C14.1 U14.P$11
N$53: C11.1 U14.P$9
N$54: LED1.P$2 U11.15
N$55: LED2.P$2 U11.1
N$56: LED3.P$2 U11.2
N$57: LED4.P$2 U11.3
N$58: LED5.P$2 U11.4
N$59: LED6.P$2 U11.5
N$60: LED7.P$2 U11.6
N$61: LED8.P$2 U11.7
N$62: LED1.P$1 R54.2
N$63: LED2.P$1 R55.2
N$64: LED3.P$1 R56.2
N$65: LED4.P$1 R57.2
N$66: LED5.P$1 R58.2
N$67: LED6.P$1 R59.2
N$68: LED7.P$1 R60.2
N$69: LED8.P$1 R61.2
N$70: R54.1 R55.1 R56.1 R57.1 R58.1 T5.1
N$71: R46.1 R47.1 R59.1 R60.1 R61.1 T6.1
N$72: LED9.P$2 U10.15
N$73: LED10.P$2 U10.1
N$74: LED11.P$2 U10.2
N$75: LED12.P$2 U10.3
N$76: LED13.P$2 U10.4
N$77: LED14.P$2 U10.5
N$78: LED16.P$2 U10.7
N$79: LED9.P$1 R46.2
N$80: LED10.P$1 R47.2
N$81: LED11.P$1 R48.2
N$82: LED12.P$1 R49.2
N$83: LED13.P$1 R50.2
N$84: LED14.P$1 R51.2
N$85: LED15.P$1 R52.2
N$86: LED16.P$1 R53.2
N$87: R48.1 R49.1 R50.1 R51.1 R52.1 T7.1
N$88: LED17.P$2 U12.15
N$89: LED18.P$2 U12.1
N$90: LED19.P$2 U12.2
N$91: LED20.P$2 U12.3
N$92: R66.1 R67.1 R68.1 R69.1 R70.1 R71.1 R72.1 R73.1 R74.1 R75.1 R76.1 R77.1 R78.1 R79.1 R80.1 R81.1 T10.1
N$93: R84.2 T5.3
N$94: LED15.P$2 U10.6
N$95: U10.14 U11.9
N$96: LED17.P$1 R62.2
N$97: LED18.P$1 R63.2
N$98: LED19.P$1 R64.2
N$99: LED20.P$1 R65.2
N$101: LED29.P$1 R66.2
N$102: LED21.P$1 R67.2
N$103: LED30.P$1 R68.2
N$104: R53.1 R62.1 R63.1 R64.1 R65.1 T9.1
N$105: LED22.P$1 R69.2
N$106: LED31.P$1 R70.2
N$107: LED23.P$1 R71.2
N$108: LED32.P$1 R72.2
N$109: LED24.P$1 R73.2
N$110: LED33.P$1 R74.2
N$111: LED25.P$1 R75.2
N$112: LED34.P$1 R76.2
N$113: LED26.P$1 R77.2
N$114: LED35.P$1 R78.2
N$115: U10.9 U12.14
N$116: LED27.P$1 R79.2
N$117: LED36.P$1 R80.2
N$118: R85.2 T6.3
N$119: LED28.P$1 R81.2
N$120: R86.2 T7.3
N$121: R87.2 T9.3
N$122: R89.2 T10.3
PGEC: U1.15 U$4.2
PGED: U1.16 U$4.3
RAM_SS: U1.21 U4.1
RECORD_IN: R36.1 T12.C U1.62
RIGHT_RX: R32.2
SPI1_CLK: U1.50 U6.10 U8.7
SPI1_MOSI: U1.5 U6.11 U8.6
SPI2_MISO: U1.6 U4.2 U7.2
SPI2_MOSI: U1.14 U4.5 U7.5
SPI2_SCK: U1.4 U4.6 U7.6
SR_CLK: TO_SENSOR.17 U1.12
SR_CLK1: TO_MAIN.17 U10.11 U10.12 U11.11 U11.12 U12.11 U12.12
SR_DATA: TO_SENSOR.4 U1.11
SR_DATA1: TO_MAIN.4 U11.14
SWITCH_INPUT: R40.2 U1.45 U$2.4
SWITCH_LED1: R41.1 U1.17
SYNC_IN: R82.1 T13.C U1.59
TOP_RX: R22.2
TX: U14.P$25
VCC: C18.1 C19.2 C24.2 C25.2 C28.2 C37.2 F1.2 IC1.4 U2.1 U3.1 U5.1
VEE: C24.1 C25.1 F2.2 IC1.11